# Altium PCB 9000H发射板.PcbDoc
Units mil, origin at the board's own origin, x right, y up, seen from the top; angles counter-clockwise.
Board outline 1266.01 x 2487.04 mil, 2 copper layers (Top Layer, Bottom Layer); 22 components, 23 nets, 99 pads, 32 vias.
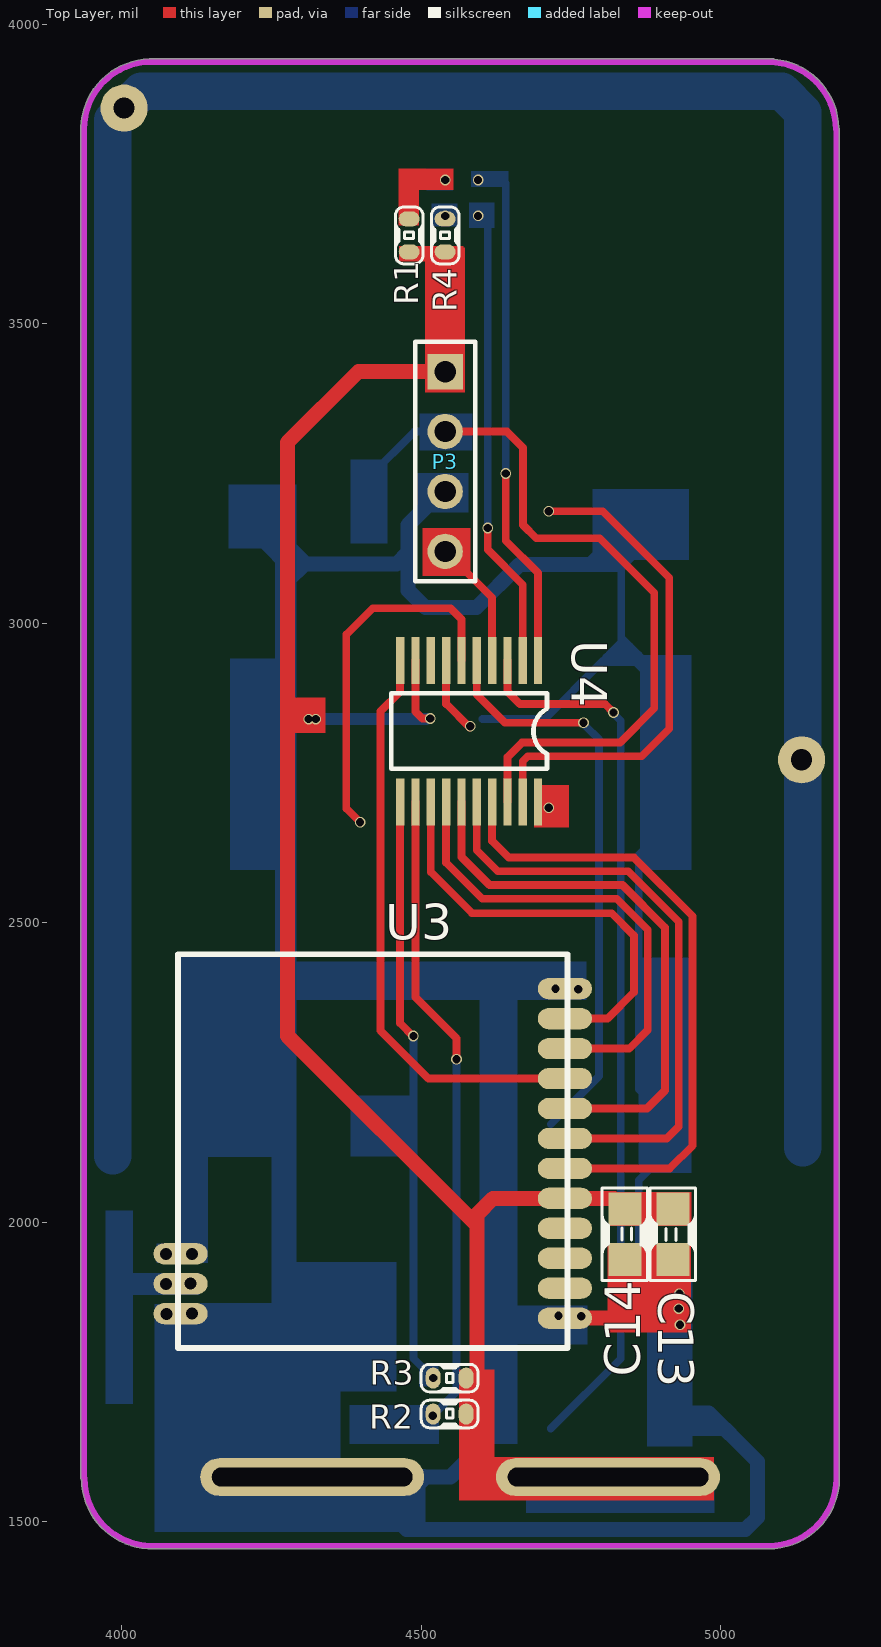
[diagram p0: Top Layer view]
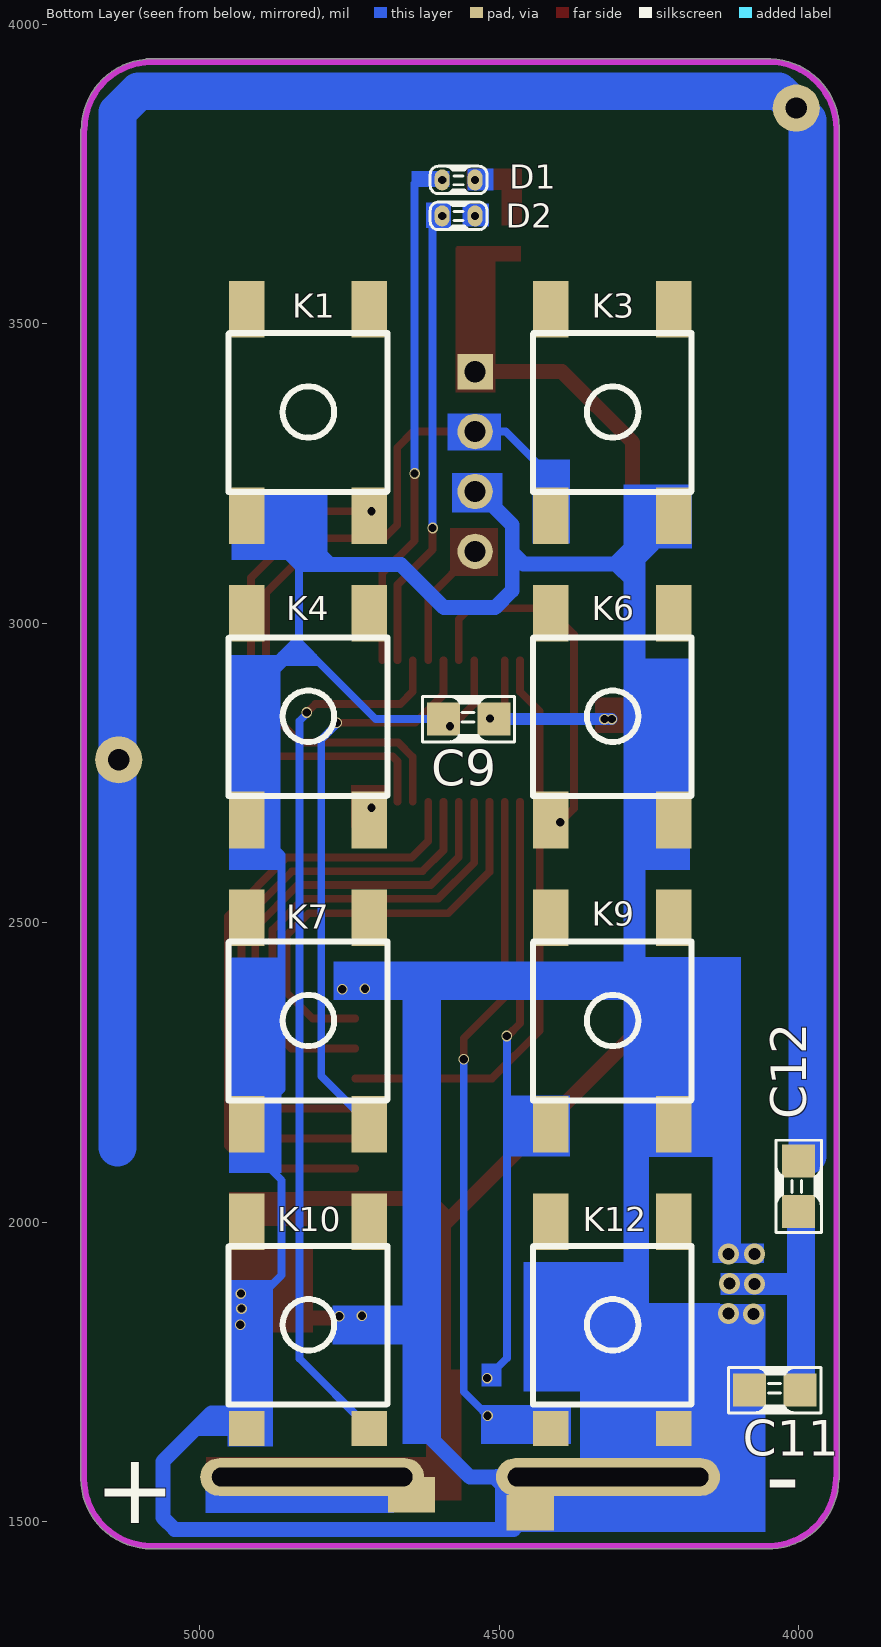
[diagram p1: Bottom Layer view, seen from below]
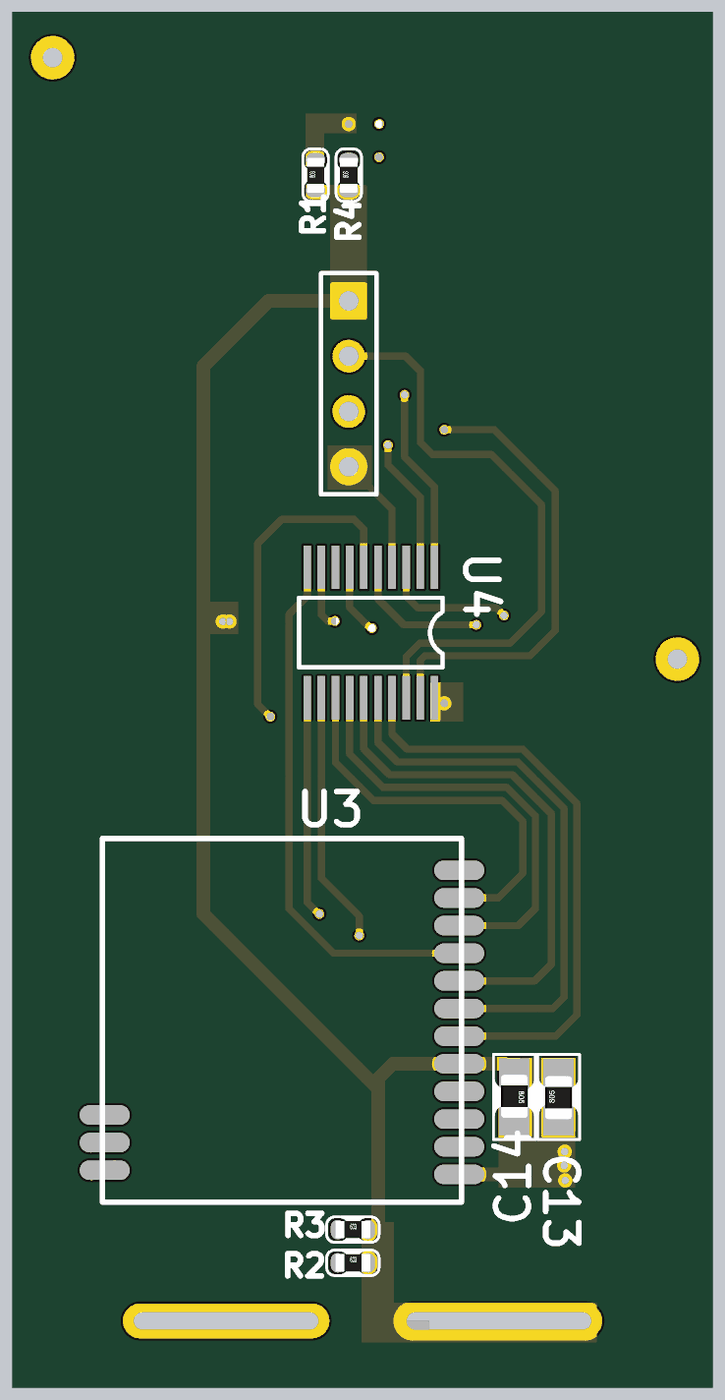
[diagram p2: 3D render of the assembled board from above, using the file's embedded part models]

## Layer stack, top to bottom
Top Layer: signal copper 1.4
Dielectric: dielectric 12.6, FR-4, Dk 4.8
Bottom Layer: signal copper 1.4

## Board outline
3933,1569.97 cw(c3937.01,1572.99) 3931.99,1572.99 3931.99,3827.01 cw(c3937.01,3827.01) 3932.03,3827.65 cw(c4049.51,3824.51) 4046.37,3941.98 cw(c4047.01,3937.01) 4047.01,3942.02 5087.99,3942.02 cw(c5087.99,3937.01) 5090.13,3941.54 cw(c5079.51,3824.51) 5197,3827.03 cw(c5192.99,3824.02) 5198.01,3824.02 5198.01,1572.99 cw(c5192.99,1572.99) 5197.98,1572.5 cw(c5192.99,1572.01) 5198.01,1572.01 cw(c5192.99,1572.01) 5198.01,1571.99 cw(c5080.49,1572.5) 5079.98,1454.98 4045,1454.98 cw(c4045,1460) 4043.59,1455.19 cw(c4050.49,1572.5)

## Design rules (kind name [scope] priority, off if disabled: settings)
Clearance [All] p1: gap=10
PolygonConnect [All] p1: connectstyle=Relief reliefconductorwidth=10 reliefentries=4 polygonreliefangle="90 Angle"
RoutingVias [All] p1: holewidth=28 width=50 viastyle="Through Hole" minholewidth=28 minwidth=50 maxholewidth=28 maxwidth=50
SilkscreenOverComponentPads [All] p1: minsilkscreentomaskgap=10
SolderMaskExpansion [All] p1: expansion=4
Width [All] p1: maxlimit=35 minlimit=13 preferedwidth=20
27 further rules are at their usual default settings.

## Components (designator, comment, footprint, x,y, rotation, side; value= is the part's Value field where it differs from the comment)
C9 "104" 0805C 4551,2840 r180 bottom
C11 "104" 0805C 4040,1720 r180 bottom
C12 "104" 0805C 4000,2060 r90 bottom
C13 "475" 0805C 4840,1980 r270 top
C14 "104" 0805C 4920,1980 r90 top
D1 "LED" 0603C 4540,3740 r0 bottom
D2 "LED" 0603C 4540,3680 r0 bottom
K1 "key_6*6*4.3" KEY_6*6*4.3#1 4818.9,3351.97 r270 bottom
K3 "key_6*6*4.3" KEY_6*6*4.3#1 4311.02,3351.97 r270 bottom
K4 "key_6*6*4.3" KEY_6*6*4.3#1 4818.9,2844.09 r270 bottom
K6 "key_6*6*4.3" KEY_6*6*4.3#1 4311.02,2844.09 r270 bottom
K7 "key_6*6*4.3" KEY_6*6*4.3#1 4818.9,2336.22 r270 bottom
K9 "key_6*6*4.3" KEY_6*6*4.3#1 4311.02,2336.22 r270 bottom
K10 "key_6*6*4.3" KEY_6*6*4.3#2 4818.9,1828.35 r270 bottom
K12 "key_6*6*4.3" KEY_6*6*4.3#2 4311.02,1828.35 r270 bottom
P3 "Header 4" HDR1X4_3D 4540,3420 r270 top
R1 "1K" 0603R 4480,3620 r90 top
R2 "1K" 0603R 4520,1680 r0 top
R3 "1K" 0603R 4520,1740 r0 top
R4 "1K" 0603R 4540,3620 r90 top
U3 "HW3000" HW3000 4740,1840 r90 top
U4 "STM8S103F2" SOP20(STM8S) 4580,2820 r270 top

## Footprints (in the part's own frame and the unit in brackets; to place one, negate y for a bottom-side part, rotate by r counter-clockwise, add the part's x,y. Pads: shape width x height; smd on the part's side, far side on the other; paste and mask are expansions set on the pad)
0603C [mil] "0603封装电容"
  oval 25x35 smd: 1(0,0) 2(55,0)
  silkscreen extent -20,-23 75,23, body extent -2,-16 60,15, height 12
0603R [mil] "0603封装电阻"
  oval 25x35 smd: 1(0,0) 2(55,0)
  silkscreen extent -20,-23 75,23, body extent -4,-16 59,16, height 12
0805C [mm] "0805封装电容"
  rect 1.4x1.4 smd: 1(-1.07,0) 2(1.07,0)
  silkscreen extent -1.96,-0.97 1.96,0.97, body extent -1.03,-0.63 0.97,0.63, height 0.77
HDR1X4_3D [mm] "Connector; Header; 4 Position"
  rect 1.5x1.5 hole 0.9: 1(0,0)
  round 1.5 hole 0.9: 2(2.54,0) 3(5.08,0) 4(7.62,0)
  silkscreen extent -1.27,-1.27 8.89,1.27, body extent -1.28,-1.29 8.9,1.29, height 8.2
HW3000 [mm]
  oval 0.9x2.3 smd: 1(0,0) 2(1.27,0) 3(2.54,0) 4(3.81,0) 5(5.08,0) 6(6.35,0) 7(7.62,0) 8(8.89,0) 9(10.16,0) 10(11.43,0) 11(12.7,0) 12(13.97,0) 13(2.73,16.3) 14(1.46,16.3) 15(0.19,16.3)
  silkscreen extent -1.27,-0.1 15.43,16.4
KEY_6*6*4.3#1 [mm]
  rect 2.4x1.5 smd: 1(-4.381,2.603) 2(4.382,2.603) 3(-4.381,-2.604) 4(4.382,-2.604)
  silkscreen extent -3.36,-3.37 3.37,3.36
KEY_6*6*4.3#2 [mm]
  rect 2.4x1.5 smd: 1(-4.381,2.603) 3(-4.381,-2.604)
  rect 1.5x1.5 smd: 2(4.382,2.603) 4(4.382,-2.604)
  silkscreen extent -3.36,-3.37 3.37,3.36
SOP20(STM8S) [mm]
  rect 2x0.35 smd: 1(-3,2.925) 2(-3,2.275) 3(-3,1.625) 4(-3,0.975) 5(-3,0.325) 6(-3,-0.325) 7(-3,-0.975) 8(-3,-1.625) 9(-3,-2.275) 10(-3,-2.925) 11(3,-2.925) 12(3,-2.275) 13(3,-1.625) 14(3,-0.975) 15(3,-0.325) 16(3,0.325) 17(3,0.975) 18(3,1.625) 19(3,2.275) 20(3,2.925)
  silkscreen extent -1.6,-3.3 1.6,3.3, body extent -2.25,-3.3 2.25,3.3, height 1.2

## Part data
C9 C11 C12 C13 C14: library part Cap, "无极性电容"
D1 D2: library part LED_, "发光二极管"
P3: "Header, 4-Pin"
R1 R2 R3 R4: library part Res_, "电阻"

## Free pads (board coordinates)
  round 78.74 hole 35.43: 0(4004,3860) 0(5135,2772)
  rect 78.74x59.06 smd far side: 0(4448,1515) 0(4646,1545)
  oval 374.02x62.99 hole 31.5 slot 334.65 at 0 deg: 24(4812,1574.8) 25(4318,1574.8)

## Via types
v1: diameter 17.72, hole 13.78, Top Layer to Bottom Layer, 26 vias
v2: diameter 35, hole 20, Top Layer to Bottom Layer, 6 vias

## Nets (pads, with @x,y where several pads share a name; then routed paths per layer and width w, separated by ;. In a path a pad name is that pad's centre, name@x,y a point inside that pad or via, vN(x,y) a via of type N, cw(c..) or ccw(c..) an arc to the next point about the centre after c; other vN are vias at no path point)
ANT: C12.2
GND: C9.1 C11.1 C13.2 C14.1 K1.4 K3.2 K4.4 K6.2 K7.4 K9.2 K10.4 K12.2 P3.3 pad.0@4448,1515 pad.25 U3.1 U3.12 U3.13 U3.15 U4.7 | length 5008.1
  Top Layer w13: U4.7 4541.61,2865.39 v1@4581,2826
  Top Layer w25: U3.1 4823,1840 4840,1857 C13.2 C14.1
  Bottom Layer w13: C9.1@4602.13,2840 4706,2840 4801,2935 ; 4848.57,2961.43 4844.13,2957 4823,2957 ; 4858.26,2951.74 4856.03,2949.5 4815.5,2949.5 ; 4863.11,2946.89 4859.73,2943.5 4809.5,2943.5 ; 4879.5,2930.5 4875,2935 4853,2935 ; 4883,2910 4858,2935 4853,2935 ; 4911,1864 4863,1912 4863,2070 4921.42,2128.42 K7.4 4863,2222.12 4863,2613.16 K4.4 4923,2673.16 4923,2887 4834,2976 ; K1.4 4896.45,3179.45 4834,3117 4834,2976 ; 4801,2935 4853,2935 ; 4801,2935 4809.5,2943.5 ; 4809.5,2943.5 4815.5,2949.5 ; 4815.5,2949.5 4823,2957 ; 4823,2957 4834,2968 4834,2976
  Bottom Layer w25: K3.2 K3.2@4208.54,3195.54 ; 4243,3132 4276,3099 4307,3099 ; 4275,3129 4277,3129 4307,3099 ; 4277,3071 4305,3099 4327,3099 ; 4277,3102 4280,3099 4307,3099 ; pad.25 4513,1574.8 ; P3.3 4534,3220 4478,3164 4478,3118 ; 4624,1650 4548.8,1574.8 4513,1574.8 ; 4804,3119 4783,3098 ; 4848,3115 4831,3098 4783,3098 ; 4307,3099 4327,3099 ; 4327,3099 4459,3099 4478,3118 ; 4478,3118 4478,3055 4507,3026 4592,3026 4664,3098 4783,3098 ; 4513,1574.8 4507.8,1574.8 4448,1515 4475.5,1487.5 5041.5,1487.5 5061,1507 5061,1601 5028.5,1633.5 ; K10.4 4953.83,1655.83 4980,1682 ; K10.4 4947.59,1682 4980,1682 ; K10.4 5006.17,1655.83 5028.5,1633.5 ; 4980,1682 5028.5,1633.5
  other v1: 4932,1829 4767,1843 4729,1844 4930,1856 4931,1881 4762,2389 4724,2390 4582,2828
  other v2: 4075,1847 4117,1848 4074,1947 4117,1947
NetC11_2: C11.2 C12.1 U3.14
  other v2: 4074,1897 4115,1898
NetD1_1: D1.1 R1.2
  other v1: 4540,3740
NetD2_1: D2.1 R4.2
  other v1: 4540,3680
NRST: P3.4 U4.4 | length 214.9
  Top Layer w13: P3.4 4541,3120 4618.39,3042.61 U4.4
PA1: K7.2 U4.5 | length 964.3
  Top Layer w13: U4.5 4592.8,2881.2 4640,2834 v1(4771,2834)
  Bottom Layer w13: K7.2 4797,2244.28 4797,2806 v1@4773,2830
PA2: K6.4 U4.6 | length 609.2
  Top Layer w13: v1(4398,2668) 4375,2691 4375,2981 4419,3025 4549,3025 4567.2,3006.8 U4.6
PA3: U3.9 U4.10 | length 972.9
  Top Layer w13: U4.10 4464.84,2885.84 4432,2853 4432,2320 4512,2240 U3.9
PB4: K12.4 R2.1 U4.12 | length 1184.1
  Top Layer w13: U4.12 4490.43,2375.57 4559,2307 v1(4559,2272)
  Bottom Layer w13: K12.4 4497.83,1655.83 4559,1717 v1(4559,2272)
  other v1: 4519.18,1677.18
PB5: K9.4 R3.1 U4.11 | length 1119.2
  Top Layer w13: U4.11 4464.84,2332.16 4486,2311 v1(4487,2311)
  Bottom Layer w13: K9.4 4469.7,2163.7 ; 4487,2147 4486.4,2147 4469.7,2163.7 ; 4487,2157 4480.3,2163.7 4469.7,2163.7 ; v1(4487,2311) 4487,2190 ; v1(4520,1740) 4487,1773 4487,2190 ; 4469.7,2163.7 4487,2181 4487,2190
PC3: U3.11 U4.13 | length 727.9
  Top Layer w13: U4.13 4516.02,2584.98 4585,2516 4817.89,2516 4855,2478.89 4855,2384 4811,2340 U3.11
PC4: U3.10 U4.14 | length 802.5
  Top Layer w13: U4.14 4541.61,2600.39 4602,2540 4826.42,2540 4878,2488.42 4878,2321 4847,2290 U3.10
PC5: U3.8 U4.15 | length 932.1
  Top Layer w13: U4.15 4567.2,2609.8 4614,2563 4835.95,2563 4907,2491.95 4907,2220 4877,2190 U3.8
PC6: U3.7 U4.16 | length 1007.2
  Top Layer w13: U4.16 4592.8,2621.2 4628,2586 4845.47,2586 4930,2501.47 4930,2160 4910,2140 U3.7
PC7: U3.6 U4.17 | length 1063.7
  Top Layer w13: U4.17 4618.39,2636.61 4646,2609 4855,2609 4953,2511 4953,2128 4915,2090 U3.6
PD2: K1.2 U4.19 | length 833.6
  Top Layer w13: U4.19 4669.57,2769.57 4678,2778 4868,2778 4914,2824 4914,3076 4803,3187 v1(4713,3187)
PD3: K4.2 U4.20
  other v1: 4713,2692
PD4: D1.2 U4.1 | length 818.3
  Top Layer w13: v1(4641,3250) 4641,3138 4695.16,3083.84 U4.1
  Bottom Layer w13: v1(4641,3250) 4641,3734
  other v1: 4595,3740
PD5: D2.2 U4.2 | length 773.9
  Top Layer w13: v1(4611,3159) 4611,3123 4669.57,3064.43 U4.2
  Bottom Layer w13: v1(4595,3680) 4597,3680 4611,3666 v1(4611,3159)
PD6: K10.2 U4.3 | length 1488.6
  Top Layer w13: U4.3 4643.98,2886.02 4665,2865 4807,2865 v1(4821,2851)
  Bottom Layer w13: K10.2 4833,1772.41 4833,2837 v1@4822,2848
SWIM: K3.4 P3.2 U4.18 | length 1305.2
  Top Layer w13: P3.2 4643,3320 4670,3293 4670,3164 4692,3142 4798,3142 4889,3051 4889,2858 4832,2801 4668.47,2801 4644,2776.53 U4.18
  Bottom Layer w13: K3.4 4413.54,3244.54 4489,3320 P3.2
VCC: C9.2 C13.1 C14.2 P3.1 pad.0@4646,1545 pad.24 R1.1 R2.2 R3.2 R4.1 U3.5 U4.9 | length 2709.1
  Top Layer w13: U4.9 4490.43,2852.57 4502,2841 v1(4515,2841)
  Top Layer w25: P3.1 4395,3420 4277,3302 4277,2311 4593,1995 ; 4593,1711 4593,1995 ; C14.2 C13.1 4822.13,2040 U3.5 4620,2040 4593,2013 4593,1995
  Bottom Layer w20: v1(4312,2840) C9.2
  other v1: 4324,2840
pads on no net: K1.1 K1.3 K3.1 K3.3 K4.1 K4.3 K6.1 K6.3 K7.1 K7.3 K9.1 K9.3 K10.1 K10.3 K12.1 K12.3 U3.2 U3.3 U3.4 U4.8
copper on no net: | length 4643.4
  Bottom Layer w62.99: 3985,2111 3985,3840 4033,3888 5102,3888 5137,3853 5137,2125

## Keep-outs
Keep-Out Layer:
  lines w10: 3937.01,1572.99 3937.01,3827.01 ; 3937.01,3825 cw(c4049.51,3824.51) 4050,3937.01 ; 3937.99,1572.99 ccw(c4050.49,1572.5) 4050,1460 ; 4045,1460 5080,1460 ccw(c5080.49,1572.5) 5192.99,1572.01 ; 4047.01,3937.01 5087.99,3937.01 ; 5080,3937.01 cw(c5079.51,3824.51) 5192.01,3824.02 ; 5192.99,1572.99 5192.99,3824.02

## Other copper
Top Layer:
  rectangle net NRST: 4502,3078.99 4582.01,3159
  rectangle net VCC: 4277,2817 4340,2876
  rectangle net VCC: 4594,1536 4989,1608
  rectangle net VCC: 4563,1536 4622,1754
  rectangle net VCC: 4463,3604 4571,3630
  rectangle net NetD1_1: 4462,3664 4496,3759
  rectangle net NetD1_1: 4496,3723 4554,3759
  rectangle net VCC: 4506,3385 4573,3627
  rectangle net PD3: 4688,2659 4747,2730
  rectangle net VCC: 4815,1994 4951,2051
  rectangle net GND: 4811,1816 4950,1962
Bottom Layer:
  rectangle net VCC: 4675,1515 4990,1567
  rectangle net GND: 4639,1796 4778,1861
  rectangle net SWIM: 4382,3133 4444,3273
  rectangle net GND: 4597,1630 4661,2391
  rectangle net GND: 4282,2371 4776,2435
  rectangle net GND: 4786,3106 4947,3224
  rectangle net GND: 4865,2588 4951,2947
  rectangle net GND: 4863,2082 4951,2442
  rectangle net GND: 4494,3185 4579,3251
  rectangle net GND: 4276,1865 4459,1934
  rectangle net GND: 4365,1718 4459,1865
  rectangle net GND: 4181,2588 4275,2941
  rectangle net GND: 4178,3125 4256,3232
  rectangle net GND: 4256,2443 4292,3232
  rectangle net GND: 4096,2213 4292,2443
  rectangle net GND: 4250,1844 4292,2109
  rectangle net GND: 4144,2109 4292,2213
  rectangle net GND: 4096,1965 4144,2213
  rectangle net PB5: 4495.99,1726 4529,1764.01
  rectangle net PB4: 4380,1630 4530,1695
  rectangle net PB5: 4382,2110 4487,2212
  rectangle net NetC11_2: 3973,1697 4019,2020
  rectangle net NetC11_2: 3999,1879 4130,1915
  rectangle net GND: 4055,1483 4143,1864
  rectangle net GND: 4058,1932 4144,1965
  rectangle net GND: 4143,1483 4507,1588
  rectangle net NetD1_1: 4509,3722 4553,3759
  rectangle net NetD2_1: 4517,3662 4561,3701
  rectangle net SWIM: 4497,3288 4586,3350
  rectangle net GND: 4877,1626 4953,1904
  rectangle net PD4: 4583,3728.5 4646,3755
  rectangle net PD5: 4580,3660 4622,3702
  rectangle net GND: 4131,1590 4365,1865

## Silkscreen, mask and mechanical layers (free items; w line width, h text height)
Bottom Overlay:
  text "-" at 3997,1519 h118.11
  text "+" at 5040,1498 h118.11